# Altium PCB BaseBoard.PcbDoc (part 2 of 2)
Units mm, origin at the board's own origin, x right, y up, seen from the top; angles counter-clockwise.
Board outline 100 x 100 mm, 2 copper layers (Top Layer, Bottom Layer); 106 components, 85 nets, 460 pads, 124 vias.
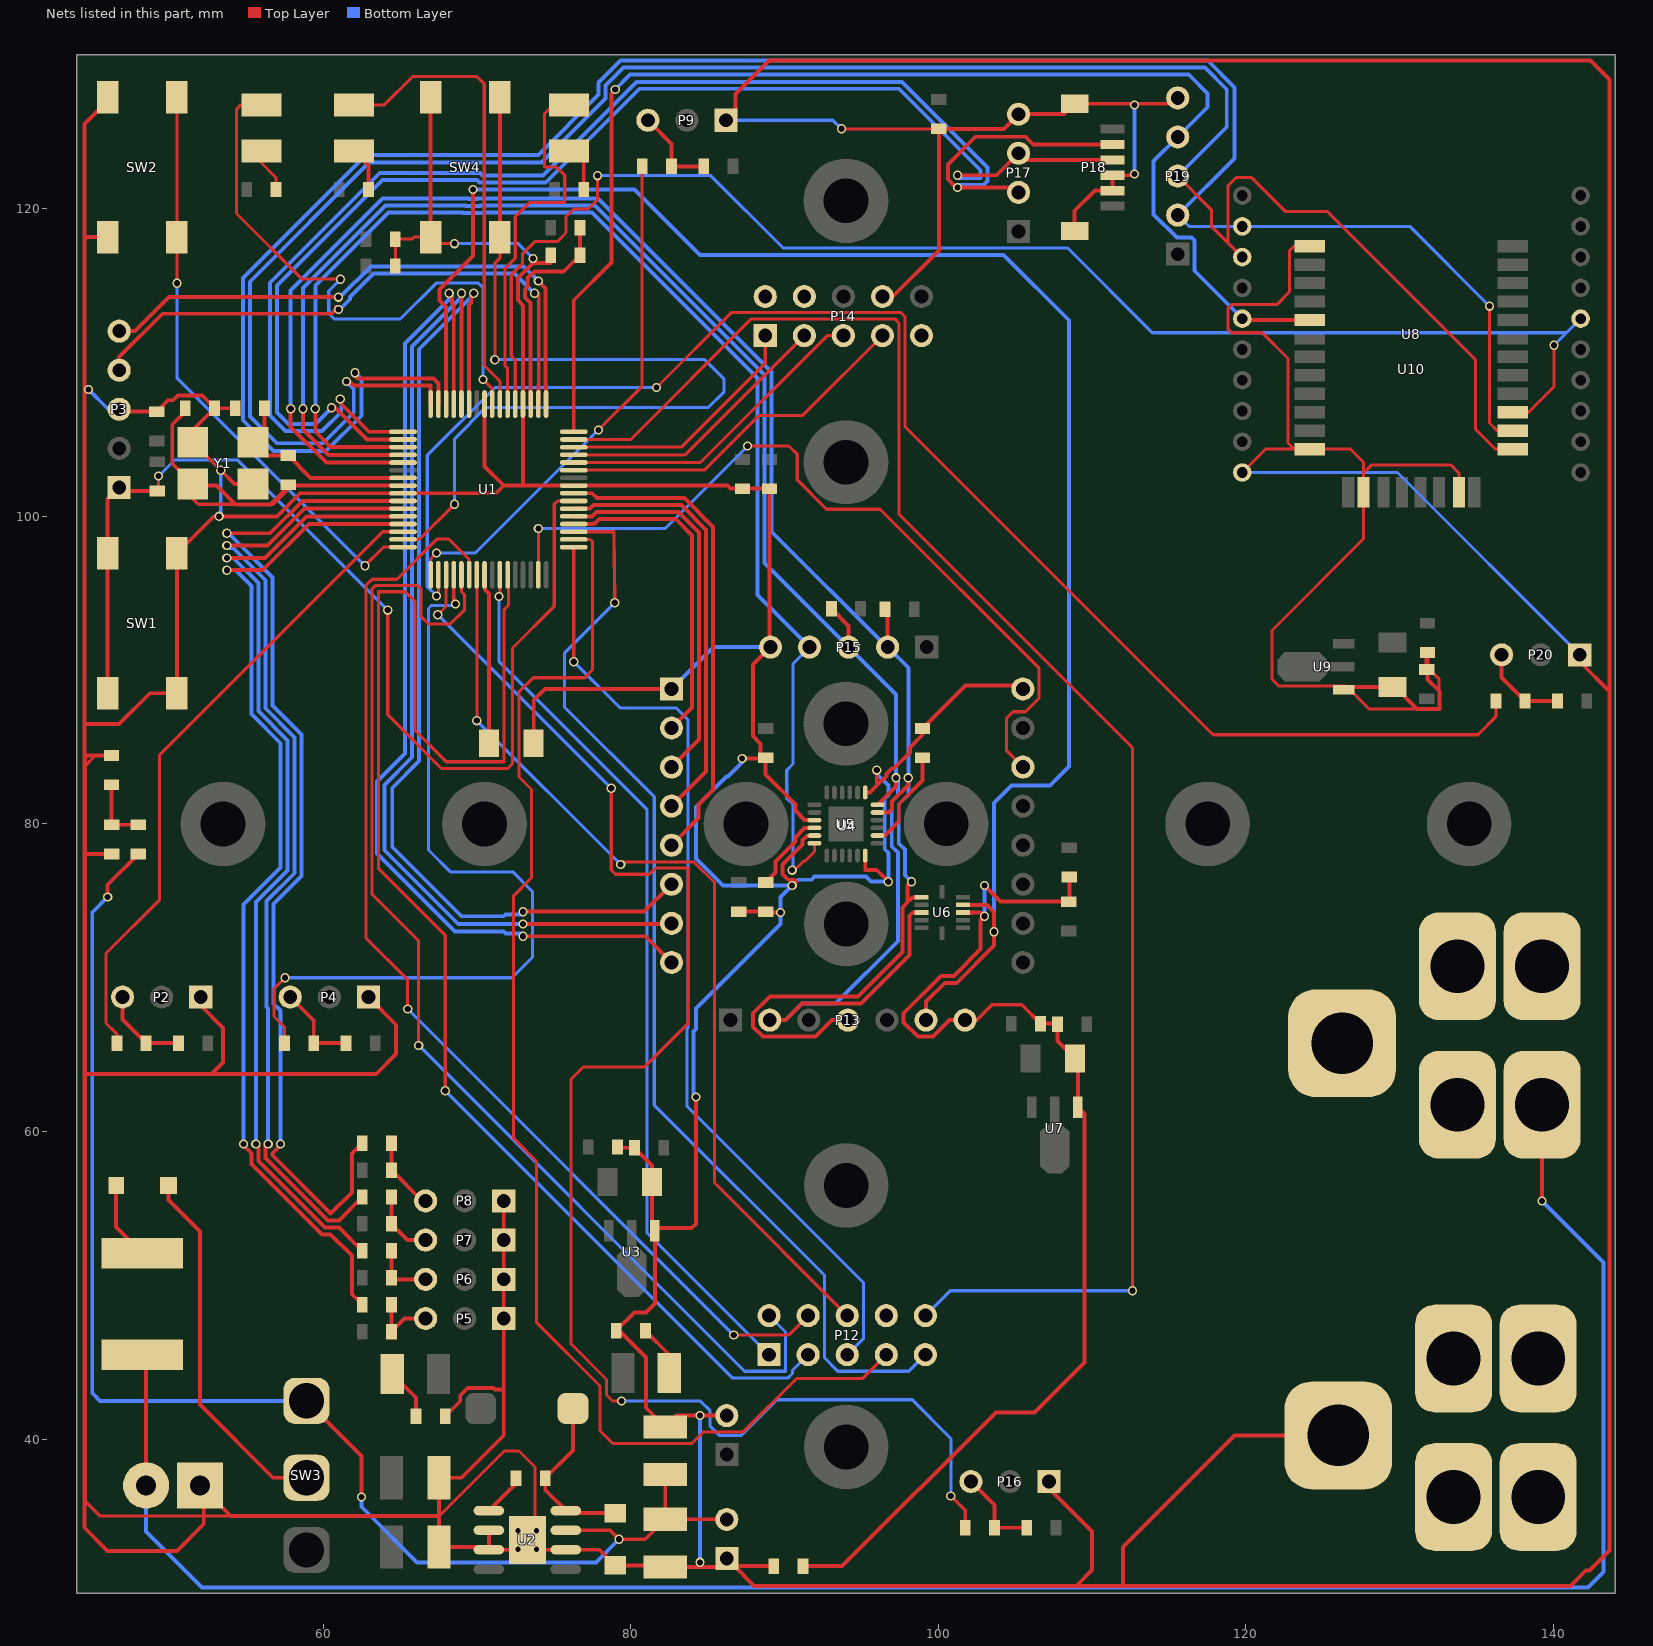
[diagram p2: the nets of this part, all layers, seen from the top]

## Via types
v1: diameter 0.6, hole 0.4, Top Layer to Bottom Layer, 116 vias
v2: diameter 0.7, hole 0.4, Top Layer to Bottom Layer, tented top, 4 vias
v3: diameter 0.66, hole 0.33, Top Layer to Bottom Layer, tented top, 4 vias

## Nets (pads, with @x,y where several pads share a name; then routed paths per layer and width w, separated by ;. In a path a pad name is that pad's centre, name@x,y a point inside that pad or via, vN(x,y) a via of type N, cw(c..) or ccw(c..) an arc to the next point about the centre after c; other vN are vias at no path point) (continued)
11V1-UF: F1.1 P1.2 pad.0@126.25,65.75 pad.1@133.75,61.75 pad.1@139.25,61.75 pad.2@133.75,70.75 pad.2@139.25,70.75 | length 140.3
  Top Layer w0.254: F1.1@48.25,45.5 48.5,45.25 P1.2@48.5,37 ; v1(139.25,55.5) pad.1@139.25,61.75
  Bottom Layer w0.254: P1.2@48.5,37 48.5,34 52.123,30.377 142.25,30.377 143.25,31.377 143.25,51.5 v1(139.25,55.5)
AVDD: C11.2 R20.1 U1.19 | length 14.2
  Top Layer w0.254: U1.19@73.5,107.3 73.5,113.863 73.123,114.24 73.123,114.759 73.307,114.943 73.307,115.493 73.74,115.927 75.652,115.927 C11.2@76.7,116.975 R20.1@76.7,118.75
"BATTERY VOLTAGE": C1.2 R1.1 R3.2 | length 4.3
  Top Layer w0.254: R1.1@46.25,82.55 46.25,79.975 C1.2@46.275,79.95 R3.2@48,79.95
FU1: P12.1 U1.58 | length 58
  Top Layer w0.2: v1(71.45,94.793) 71.5,94.843 U1.58@71.5,96.2
  Bottom Layer w0.2: v1(71.45,94.793) 71.45,90.551 81.051,80.95 81.051,53.449 P12.1@89,45.5
FU2: P12.3 U1.59 | length 96.3
  Top Layer w0.2: v1(67.945,62.662) 67.945,72.771 63.602,77.114 63.602,95.098 63.603,95.099 65.352,95.099 65.98,94.472 65.98,86.09 68.021,84.049 71.755,84.049 71.755,93.905 72.05,94.2 72.05,95.343 72,95.393 U1.59@72,96.2
  Bottom Layer w0.2: v1(67.945,62.662) 86.628,43.979 90.221,43.979 90.521,44.279 90.521,44.481 P12.3@91.54,45.5
FU3: P12.5 U1.1 | length 62.9
  Top Layer w0.2: U1.1@76.3,98 76.302,98 v1(76.302,90.551)
  Bottom Layer w0.2: v1(76.302,90.551) 79.315,87.538 82.972,87.538 83.718,86.792 83.718,66.743 83.65,66.675 83.65,61.663 95.148,50.165 95.148,46.568 P12.5@94.08,45.5
FU4: P12.7 U1.2 | length 87.5
  Top Layer w0.2: U1.2@76.3,98.5 77.368,98.5 77.521,98.348 77.521,90.018 77.013,89.51 73.66,89.51 72.746,88.595 72.746,83.058 73.558,82.245 73.558,76.505 72.39,75.336 72.39,59.563 73.889,58.064 73.889,47.585 78.003,43.47 78.003,40.564 78.842,39.726 83.972,39.726 84.734,40.488 87.325,40.488 90.78,43.942 95.062,43.942 P12.7@96.62,45.5
FU5: P12.9 U1.3 | length 72.1
  Top Layer w0.2: U1.3@76.3,99 78.927,99 v1(78.969,94.386)
  Bottom Layer w0.2: v1(78.969,94.386) 75.692,91.11 75.692,87.605 81.534,81.763 81.534,61.722 92.608,50.648 92.608,45.288 93.472,44.425 98.085,44.425 P12.9@99.16,45.5
FU6: P12.2 U1.53 | length 78.5
  Top Layer w0.2: v1(66.218,65.608) 66.218,72.39 63.195,75.413 63.195,95.296 63.398,95.499 66.146,95.499 66.38,95.266 66.38,93.472 66.853,92.999 68.275,92.999 69.205,93.929 69.205,94.891 69,95.097 U1.53@69,96.2
  Bottom Layer w0.2: v1(66.218,65.608) 87.401,44.425 90.068,44.425 90.068,46.972 P12.2@89,48.04
FU7: P12.4 U1.54 | length 73.5
  Top Layer w0.2: v1(65.507,67.97) 65.507,69.875 62.789,72.593 62.789,95.504 63.195,95.91 64.806,95.91 67.435,98.54 68.161,98.54 69.5,97.2 U1.54@69.5,96.2 ; v1(86.705,46.772) 90.272,46.772 P12.4@91.54,48.04
  Bottom Layer w0.2: v1(65.507,67.97) v1(86.705,46.772)
FU8: P12.6 U1.55 | length 61.2
  Top Layer w0.2: v1(70,86.718) U1.55@70,96.2 ; v1(79.35,77.368) 79.511,77.53 84.11,77.53 85.446,76.194 85.446,56.674 P12.6@94.08,48.04
  Bottom Layer w0.2: v1(70,86.718) v1(79.35,77.368)
FU9: P12.8
FU10: P12.10 U1.15 | length 107.8
  Top Layer w0.2: U1.15@76.3,105 80.006,105 87.846,112.84 97.167,112.84 97.434,112.573 97.434,100.152 112.624,84.963 v1(112.624,49.657)
  Bottom Layer w0.2: P12.10@99.16,48.04 100.777,49.657 v1(112.624,49.657)
FU11: P14.1 U1.14 | length 16.5
  Top Layer w0.2: U1.14@76.3,104.5 83.298,104.5 88.75,109.952 P14.1@88.75,111.75
FU12: P14.3 U1.13 | length 18.2
  Top Layer w0.2: U1.13@76.3,104 83.54,104 P14.3@91.29,111.75
FU13: P14.5 U1.12 | length 20.9
  Top Layer w0.2: U1.12@76.3,103.5 84.526,103.5 92.776,111.75 P14.5@93.83,111.75
FU14: P14.7 U1.11 | length 23.7
  Top Layer w0.2: U1.11@76.3,103 84.788,103 88.352,106.564 91.184,106.564 P14.7@96.37,111.75
FU15: P14.9
FU16: P14.2
FU17: P14.4
GND: C1.1 C2.1 C3.1 C4.1 C5.1 C6.1 C7.1 C8.1 C9.1 C11.1 C12.1 C13.1 C14.1 C15.1 C16.1 C17.1 C18.1 C19.1 C20.1 C21.1 C22.1 C23.1 C29.1 C30.1 C31.1 D6.1 P1.1 P2.1 P3.3 P4.1 P5.1 P6.1 P7.1 P8.1 P9.1 P10.1 P11.2 P14.8 P15.5 P16.1 P17.4 P18.0 P18.A4 P18.A5 P19.5 P20.1 pad.0@126,40.25 pad.1@133.5,36.25 pad.1@139,36.25 pad.2@133.5,45.25 pad.2@139,45.25 R1.2 R19.1 R22.1 R25.2 SW1.1 SW1.4 SW2.1 SW2.4 SW4.1 SW4.4 U1.9 U1.20 U1.25 U1.41 U2.2 U2.3 U2.6 U2.9 U3.1 U4.1 U4.16 U5.1 U5.9 U5.11 U5.18 U8.10 U9.1 U10.1 U10.12 U10.28 U10.29 Y1.2 Y1.4 | length 996.8
  Top Layer w0.2: 44.55,84.45 44.55,83.788 ; R1.2@46.25,84.45 45.212,84.45 44.55,83.788 ; C7.1@64.7,116.275 C8.1@64.7,118.025 65.786,118.025 65.911,118.15 SW4.4@67,118.15 67,117.729 v1(68.555,117.729) ; v3(72.684,34.053) 72.684,33.452 U2.9@73.284,33.453 ; v1(73.66,116.764) 73.949,116.475 74.8,116.475 C11.1@74.8,116.975 ; v3(73.884,34.053) 73.787,34.15 73.787,38.202 72.746,39.243 71.78,39.243 67.539,35.001 45.517,35.001 44.55,35.968 44.55,78.05 44.55,83.788 ; v1(93.703,125.194) C23.1@100.037,125.194 ; U8.10@119.759,102.852 121.273,104.366 123.139,104.366 ; U10.1@124.145,117.566 123.139,117.566 122.834,117.261 122.834,114.605 121.996,113.767 119.075,113.767 118.847,113.538 118.847,112.166 119.075,111.938 121.056,111.938 122.733,110.261 122.733,104.772 123.139,104.366 ; C31.1@131.8,91.144 131.8,90.171 132.563,89.408 132.563,87.478 128.014,87.478 126.517,88.974 122.125,88.974 121.691,89.408 121.691,92.583 127.645,98.537 U10.29@127.645,101.566 127.645,102.819 ; U10.28@133.845,101.566 133.845,102.819 133.337,103.327 128.153,103.327 127.645,102.819 ; 123.139,104.366 U10.12@124.145,104.366 126.797,104.366 127.645,103.518 127.645,102.819
  Top Layer w0.254: 44.55,78.05 C1.1@46.275,78.05 ; 44.55,84.45 R1.2@46.25,84.45 ; v1(44.75,108.25) v1@44.5,108.25 ; SW2.4@46,118.15 44.65,118.15 44.5,118 ; SW2.1@46,127.25 46,127 44.5,125.5 44.5,118 ; P3.3@46.75,106.96 46.904,106.806 C3.1@49.19,106.806 49.93,107.546 50.259,107.546 50.565,107.852 52.148,107.852 52.95,107.05 C2.1@52.95,107.025 ; P1.1@52,37 P1.1@52.25,36.75 ; P2.1@52.05,68.75 52.05,68.2 53.5,66.75 53.5,64.5 52.75,63.75 ; C4.1@54.3,107.035 54.29,107.025 C2.1@52.95,107.025 ; Y1.2@55.45,102.1 54.25,102.1 v1(53.35,103) Y1.4@51.525,104.825 51.525,105.6 C2.1@52.95,107.025 ; P4.1@62.95,68.75 64.75,66.95 64.75,65.037 63.463,63.75 52.75,63.75 ; SW4.4@67,118.15 SW4.1@67,127.25 ; R19.1@67.95,41.5 68.923,42.473 68.923,42.843 69.407,43.327 71.093,43.327 71.17,43.25 71.75,43.25 ; U1.25@70.5,107.3 70.5,103.25 71.75,102 ; U2.2@70.784,34.088 U2.3@70.784,32.818 ; P8.1@71.75,55.5 P7.1@71.75,52.95 P6.1@71.75,50.4 P5.1@71.75,47.85 71.75,43.25 ; C9.1@73.7,85.25 73.7,88.05 74.43,88.78 U4.1@82.66,88.78 ; C11.1@74.8,116.475 73.646,116.475 72.669,115.498 72.669,114.052 73,113.721 U1.20@73,107.3 73,102 ; C13.1@79.15,59 79.2,58.95 C16.1@80.25,58.95 81.4,57.8 C12.1@81.4,56.725 81.4,53.724 U3.1@81.57,53.554 ; v1(84.25,62.25) 84.25,54 83.974,53.724 81.74,53.724 U3.1@81.57,53.554 ; v1(84.5,32) v1@84.5,31.7 ; P9.1@86.2,125.75 86.627,125.75 86.823,125.946 86.823,127.465 88.981,129.623 142.392,129.623 143.623,128.392 143.623,88.627 ; P11.2@86.25,41.54 v1(84.5,41.54) 82.99,41.54 C15.1@82.25,40.8 81,42.05 81,45.319 79.272,47.047 R22.1@79.06,47.047 79.06,47.06 80.25,48.25 81,48.25 81.57,48.82 U3.1@81.57,53.554 ; C18.1@87.025,74.3 C17.1@88.775,74.3 88.825,74.25 v1(89.75,74.25) ; v1(87.25,84.25) 88.725,84.25 C19.1@88.775,84.3 ; R25.2@89.3,31.75 P10.1@86.75,31.75 ; v1(90.5,76) 90.75,76.25 90.627,76.373 90.24,76.373 89.873,76.74 89.873,77.373 91.173,78.673 91.173,78.948 91.452,79.227 91.927,79.227 U5.11@91.95,79.25 ; U5.9@91.95,80.25 91.927,80.273 91.31,80.273 90.719,80.864 90.719,81.281 88.775,83.225 C19.1@88.775,84.3 ; U5.18@95.25,77.95 95.25,77 96,77 v1(96.75,76.25) ; U5.1@95.25,82.05 95.55,82.05 96,82.5 ; v1(96,83.5) 96,82.5 ; P14.8@96.37,114.29 97.04,114.29 100.037,117.287 C23.1@100.037,125.194 104.269,125.194 P17.4@105.219,126.144 108.184,126.144 P18.0@108.865,126.825 v1@112.75,126.825 ; U4.16@105.5,88.78 105.28,89 101.775,89 C22.1@98.975,86.2 98.975,85.804 98.148,84.977 98.148,84.648 97.127,83.627 96.99,83.627 96.623,83.26 96.623,83.123 96,82.5 ; P16.1@107.2,37.25 107.2,36.8 110,34 110,31.5 108.969,30.469 ; P18.0@108.865,118.55 108.865,119.865 110.175,121.175 P18.A5@111.315,121.175 P18.A4@111.315,122.175 112.675,122.175 v1(112.75,122.25) ; v1(112.75,126.75) v1@112.75,126.825 ; P19.5@115.568,127.202 115.191,126.825 v1@112.75,126.825 ; pad.0@126,40.25 119.25,40.25 112,33 112,30.469 ; U9.1@126.354,88.724 126.524,88.894 C29.1@129.525,88.894 129.688,88.894 131.115,87.467 132.567,87.467 132.577,87.477 132.577,88.63 131.8,89.407 C31.1@131.8,91.144 131.75,91.094 C30.1@131.75,90.044 ; P20.1@141.7,91 141.7,90.55 143.623,88.627 ; 44.5,63.75 52.75,63.75 ; 44.5,63.75 44.5,86.5 ; 44.5,63.75 44.5,34.25 46,32.75 50.5,32.75 52.25,34.5 P1.1@52.25,36.75 ; 44.5,86.5 v1@44.5,108.25 ; 44.5,86.5 46.75,86.5 48.75,88.5 SW1.1@50.5,88.5 SW1.4@50.5,97.6 52.9,100 v1(53.25,100) 57.012,100 58.512,101.5 U1.41@65.2,101.5 71.25,101.5 71.75,102 ; v1@44.5,108.25 44.5,118 ; P1.1@52.25,36.75 54,35 67.5,35 67.55,35.05 ; 67.55,35.05 C5.1@67.55,33 70.602,33 U2.3@70.784,32.818 ; 67.55,35.05 C6.1@67.55,37.5 69,37.5 71.75,40.25 71.75,43.25 ; U2.3@70.784,32.818 72.649,32.818 v3(72.684,32.853) U2.9@73.284,33.453 v3(73.884,32.853) 73.919,32.818 U2.6@75.784,32.818 77.982,32.818 D6.1@79,31.8 82.15,31.8 C14.1@82.25,31.7 v1@84.5,31.7 ; 71.75,102 73,102 ; 73,102 U1.9@76.3,102 86.3,102 86.5,101.8 C21.1@87.275,101.8 C20.1@89.025,101.8 89.025,91.565 P15.5@89.09,91.5 87.948,90.358 87.948,85.715 88.45,85.213 88.45,84.3 C19.1@88.775,84.3 ; v1@84.5,31.7 85.7,31.7 P10.1@86.25,32.25 P10.1@86.75,31.75 ; P10.1@86.75,31.75 88.031,30.469 108.969,30.469 ; 108.969,30.469 112,30.469 ; 112,30.469 141.092,30.469 142.092,31.469 142.324,31.469 143.623,32.768 143.623,88.627
  Bottom Layer w0.2: v1(68.555,117.729) 72.695,117.729 v1(73.66,116.764) ; v3(72.684,34.053) v3(73.884,34.053) ; P9.1@86.2,125.75 93.147,125.75 v1(93.703,125.194) ; U8.10@119.759,102.852 129.848,102.852 P20.1@141.7,91
  Bottom Layer w0.254: v1(44.75,108.25) 46.04,106.96 P3.3@46.75,106.96 ; v1(53.25,100) 53.35,100.1 v1(53.35,103) ; U4.1@82.66,88.78 85.38,91.5 P15.5@89.09,91.5 ; v1(84.25,62.25) 84.168,62.168 84.082,62.168 84.082,66.503 84.25,66.671 84.25,68 89.75,73.5 v1(89.75,74.25) 89.75,75.25 v1(90.5,76) ; v1(84.5,32) v1(84.5,41.54) ; v1(87.25,84.25) 87.25,84 86.327,83.077 86.225,83.077 84.25,81.102 84.25,77.75 86,76 v1(90.5,76) ; v1(96,83.5) 96,83.25 96.75,82.5 96.75,81.886 96.522,81.657 96.522,78.356 96.75,78.128 v1(96.75,76.25) 95.615,76.25 95.288,76.577 91.964,76.577 91.76,76.373 90.873,76.373 v1(90.5,76) ; v1(112.75,122.25) v1(112.75,126.75)
GNDA: C24.1 C25.1 C26.1 C27.1 C28.1 P13.7 R25.1 U6.3 U7.1 | length 79.5
  Top Layer w0.254: R25.1@91.2,31.75 93.75,31.75 103.75,41.75 106.25,41.75 109.5,45 109.5,61.149 U7.1@109.07,61.579 109.07,64.58 C24.1@108.9,64.75 107.75,65.9 C26.1@107.75,66.975 107.7,67.025 C25.1@106.65,67.025 105.425,68.25 103.5,68.25 102.5,67.25 P13.7@101.74,67.25 100.723,67.25 99.646,66.173 98.673,66.173 97.75,67.096 97.75,67.698 100.175,70.123 101.01,70.123 102.75,71.863 102.75,73.75 v1(103,74) 102.75,74.25 U6.3@101.6,74.25 101.623,74.227 102.185,74.227 ; v1(103,76) 104.05,74.95 C27.1@108.475,74.95 108.525,75 C28.1@108.525,76.55
  Bottom Layer w0.254: v1(103,74) v1(103,76)
"GPS - MISO": P17.3 P18.A3 U1.34 | length 84.3
  Top Layer w0.254: v1(60.557,107.057) 60.801,107.057 62.858,105 U1.34@65.2,105 ; v1(101.25,122.173) 103.788,122.173 P17.3@105.219,123.604 105.648,123.175 P18.A3@111.315,123.175
  Bottom Layer w0.254: v1(60.557,107.057) 59.5,106 57.75,106 57,106.75 57,115 63.877,121.877 70.01,121.877 70.183,121.704 74.483,121.704 80.575,127.796 97.454,127.796 102.75,122.5 102.75,122 101.423,122 v1(101.25,122.173)
"GPS - MOSI": P17.2 P18.A2 U1.33 | length 95.2
  Top Layer w0.254: v1(61.122,107.622) 61.122,107.378 63,105.5 U1.33@65.2,105.5 ; v1@101.163,121.373 100.623,121.913 100.623,122.873 102.431,124.681 105.665,124.681 106.171,124.175 P18.A2@111.315,124.175 ; v1(101.25,121.373) 104.91,121.373 P17.2@105.219,121.064
  Bottom Layer w0.254: v1(61.122,107.622) 61.184,107.561 61.184,106.797 59.933,105.546 57.562,105.546 56.546,106.562 56.546,115.188 63.689,122.331 70.198,122.331 70.371,122.158 74.295,122.158 80.387,128.25 97.642,128.25 103.204,122.688 103.204,121.812 102.938,121.546 101.423,121.546 v1(101.25,121.373)
"IMU ANALOG CONFIGMODE": U1.63 U4.14 | length 53
  Top Layer w0.2: U1.63@74,96.2 v1(74,99.212) ; v1(87.605,104.572) 90.297,104.572 90.83,104.038 90.83,102.37 92.737,100.464 96.209,100.464 106.553,90.119 106.553,88.189 105.664,87.3 104.851,87.3 104.445,86.893 104.445,84.755 U4.14@105.5,83.7
  Bottom Layer w0.2: v1(74,99.212) 82.245,99.212 v1(87.605,104.572)
"IMU ANALOG X": U1.27 U4.6 | length 66.4
  Top Layer w0.254: U1.27@69.5,107.3 69.5,113.75 69.627,113.877 69.627,114.327 v1(69.8,114.5) ; v1(73,74.3) 80.88,74.3 U4.6@82.66,76.08
  Bottom Layer w0.254: v1(69.8,114.5) 69.8,114.413 66.25,110.863 66.25,84.086 64.5,82.336 64.5,78.5 69,74 71.75,74 71.877,74.127 72.827,74.127 v1(73,74.3)
"IMU ANALOG Y": U1.28 U4.7 | length 66.1
  Top Layer w0.254: U1.28@69,107.3 v1(69,114.5) ; v1(73,73.5) 82.62,73.5 U4.7@82.66,73.54
  Bottom Layer w0.254: v1(69,114.5) 69,114.255 65.796,111.051 65.796,84.339 64,82.543 64,78.293 68.793,73.5 v1(73,73.5)
"IMU ANALOG Z": U1.29 U4.8 | length 67.8
  Top Layer w0.254: v1(68.2,114.5) 68.373,114.327 68.373,113.877 68.5,113.75 U1.29@68.5,107.3 ; v1(73,72.7) 80.96,72.7 U4.8@82.66,71
  Bottom Layer w0.254: v1(68.2,114.5) 68.2,114.097 65.342,111.239 65.342,84.592 63.5,82.75 63.5,78.086 68.586,73 71.75,73 71.877,72.873 72.827,72.873 v1(73,72.7)
"IMU INTERRUPT": U1.8 U4.5 | length 31.8
  Top Layer w0.254: U1.8@76.3,101.5 77.5,101.5 77.819,101.181 83.495,101.181 85.362,99.314 85.362,82.214 84.423,81.275 84.423,80.383 U4.5@82.66,78.62
"IMU PWM X": U1.4 U4.2 | length 21.3
  Top Layer w0.254: U1.4@76.3,99.5 77.5,99.5 77.546,99.546 77.688,99.546 77.961,99.819 82.931,99.819 84,98.75 84,87.58 U4.2@82.66,86.24
"IMU PWM Y": U1.5 U4.3 | length 24.8
  Top Layer w0.254: U1.5@76.3,100 77.5,100 77.773,100.273 83.119,100.273 84.454,98.938 84.454,85.494 U4.3@82.66,83.7
"IMU PWM Z": U1.6 U4.4 | length 28.3
  Top Layer w0.254: U1.6@76.3,100.5 77.358,100.5 77.585,100.727 83.307,100.727 84.908,99.126 84.908,83.408 U4.4@82.66,81.16
"INPUT 11.1V": D1.2 SW3.1 | length 24
  Top Layer w0.254: D1.2@49.95,56.5 49.95,55.55 52,53.5 52,42.25 56.75,37.5 SW3.1@58.925,37.5
"INPUT 11.1V-AFTERSW": C14.2 C15.2 P10.2 R3.1 SW3.2 U2.7 | length 91.8
  Top Layer w0.254: v1(46,75.25) 46,76.05 R3.1@48,78.05 ; SW3.2@58.925,42.5 62.5,38.925 v1(62.5,36.25) ; U2.7@75.784,34.088 78.662,34.088 v1(79.25,33.5) 80.95,33.5 C14.2@82.25,34.8 ; C15.2@82.25,37.7 C14.2@82.25,34.8 ; P10.2@86.25,34.79 86.24,34.8 C14.2@82.25,34.8
  Bottom Layer w0.254: v1(46,75.25) 45,74.25 45,43 45.5,42.5 SW3.2@58.925,42.5 ; v1(62.5,36.25) 62.5,35.613 66.113,32 77.75,32 v1(79.25,33.5)
"INT0 ACCELEROMETER": P13.6 U1.30 U6.4 | length 112.1
  Top Layer w0.254: U1.30@68,107.3 68,113.608 67.573,114.035 67.573,114.76 69.75,116.937 v1(69.75,121.25) ; P13.6@99.2,67.25 99.2,68.45 100.419,69.669 101.198,69.669 103.627,72.098 v1(103.627,73) 103.627,74.265 103.165,74.727 101.623,74.727 U6.4@101.6,74.75
  Bottom Layer w0.254: v1(69.75,121.25) 80.25,121.25 84.5,117 104.25,117 108.5,112.75 108.5,83.75 107.25,82.5 104.75,82.5 103.627,81.377 v1(103.627,73)
"INT1 GYRO": P15.4 U1.35 U5.12 | length 87.5
  Top Layer w0.2: v1(90.5,77) 90.651,77 91.251,77.6 91.35,77.6 91.95,78.2 U5.12@91.95,78.75
  Top Layer w0.254: v1(59.5,107) 59.5,105.5 60.5,104.5 U1.35@65.2,104.5
  Bottom Layer w0.2: v1(90.5,77) 90.55,77.05 90.55,81.263 90.15,81.663 90.15,83.499 90.55,83.899 90.55,90.42 P15.4@91.63,91.5
  Bottom Layer w0.254: v1(59.5,107) 59.5,115 64.25,119.75 69.079,119.75 69.114,119.715 70.386,119.715 70.421,119.75 77.5,119.75 88.25,109 88.25,94.88 P15.4@91.63,91.5
LED1: D3.2 U1.23 | length 30.7
  Top Layer w0.2: D3.2@62,126.75 63.987,126.75 65.837,128.6 70.002,128.6 70.485,128.118 70.485,109.809 71.5,108.794 U1.23@71.5,107.3
LED2: D2.2 U1.24 | length 38.7
  Top Layer w0.2: D2.2@56,126.75 54.661,126.75 54.381,126.471 54.381,119.685 58.649,115.418 v1(61.138,115.418) ; v1(70.409,108.897) 71,108.306 U1.24@71,107.3
  Bottom Layer w0.2: v1(61.138,115.418) 60.376,114.656 60.376,113.182 60.731,112.827 65.024,112.827 67.361,115.164 70.104,115.164 70.409,114.859 v1(70.409,108.897)
LED3: D5.2 U1.22 | length 24.7
  Top Layer w0.2: U1.22@72,107.3 72,109.616 71.838,109.779 71.838,116.127 72.5,116.789 72.5,119.482 73.414,120.396 75.692,120.396 75.692,120.65 75.717,120.675 75.717,122.167 75.184,122.7 74.4,122.7 74.4,126.169 74.981,126.75 D5.2@76,126.75
M\C\L\R\: P3.1 R5.1 SW1.2 SW1.3 U1.7 | length 72.9
  Top Layer w0.2: P3.1@46.75,101.88 46.75,101.524 46.974,101.524 P3.1@46.974,101.656 ; R5.1@49.215,101.656 49.301,101.656 v1(49.301,102.616) ; v1(64.211,93.902) 64.211,87.097 67.695,83.613 72.005,83.613 72.314,83.922 72.314,91.44 75.032,94.158 75.032,100.787 75.244,101 U1.7@76.3,101
  Top Layer w0.254: SW1.2@46,88.5 SW1.3@46,97.6 46,101.13 P3.1@46.75,101.88 ; P3.1@46.974,101.656 R5.1@49.215,101.656
  Bottom Layer w0.2: v1(49.301,102.616) 50.343,103.657 54.456,103.657 v1(64.211,93.902)
NetC1.1_2: C9.2 U1.56 | length 11.1
  Top Layer w0.254: U1.56@70.5,96.2 70.523,96.177 70.523,95.252 70.8,94.975 C9.2@70.8,85.25
NetC11.22_2: C17.2 U5.10 | length 5.2
  Top Layer w0.254: C17.2@88.775,76.2 89.419,76.844 89.419,77.561 90.719,78.861 90.719,79.136 91.31,79.727 91.927,79.727 U5.10@91.95,79.75
NetC12.22_2: C22.2 U5.20 | length 6.5
  Top Layer w0.254: U5.20@96.05,79.25 96.525,79.25 97.43,80.155 97.43,81.281 98.975,82.827 C22.2@98.975,84.3
NetC14.7_1: C10.1 U2.1 | length 2.8
  Top Layer w0.254: U2.1@70.784,35.358 72.55,37.124 C10.1@72.55,37.475
NetC14.7_2: C10.2 D6.2 L1.1 U2.8 | length 11.2
  Top Layer w0.254: L1.1@76.25,42 76.25,39.275 C10.2@74.45,37.475 74.45,36.692 U2.8@75.784,35.358 75.942,35.2 D6.2@79,35.2
NetD1.8_1: D1.1 F1.2 | length 5.1
  Top Layer w0.254: D1.1@46.55,56.5 46.55,53.8 F1.2@48.25,52.1
NetD3.4_2: D4.2 R19.2 | length 3.4
  Top Layer w0.254: D4.2@64.5,44.25 66.05,42.7 R19.2@66.05,41.5
NetD4.4_2: D7.2 R22.2 | length 3.4
  Top Layer w0.254: R22.2@80.96,47.047 82.51,45.497 D7.2@82.51,44.297
NetD5.4_1: D3.1 R17.1 | length 2.9
  Top Layer w0.254: D3.1@62,123.75 62.95,122.8 R17.1@62.95,121.25
NetD6.4_1: D2.1 R6.1 | length 2.9
  Top Layer w0.2: D2.1@56,123.75 56,122.972 56.95,122.022 R6.1@56.95,121.25
NetD7.4_1: D5.1 R21.1 | length 3.5
  Top Layer w0.2: D5.1@76,123.75 76.95,123.75 76.95,122.8
  Top Layer w0.254: R21.1@76.95,121.25 76.95,122.8
NetP4.9_3: P2.3 R2.1 R4.1 | length 5.7
  Top Layer w0.254: P2.3@46.97,68.75 46.97,67.28 R2.1@48.5,65.75 R4.1@50.6,65.75
NetP4.10_3: P9.3 R23.1 R24.1 | length 5.7
  Top Layer w0.254: P9.3@81.12,125.75 82.65,124.22 R23.1@82.65,122.75 R24.1@84.75,122.75
NetP4.11_3: P20.3 R30.1 R31.1 | length 5.7
  Top Layer w0.254: P20.3@136.62,91 136.62,89.53 R30.1@138.15,88 R31.1@140.25,88
NetP4.12_3: P16.3 R28.1 R29.1 | length 5.7
  Top Layer w0.254: P16.3@102.12,37.25 103.65,35.72 R28.1@103.65,34.25 R29.1@105.75,34.25
NetP4.13_3: P8.3 R15.1 R16.1 | length 4.8
  Top Layer w0.254: R16.1@64.45,59.25 R15.1@64.45,57.5 66.45,55.5 P8.3@66.67,55.5
NetP4.14_3: P7.3 R13.1 R14.1 | length 4.4
  Top Layer w0.254: R13.1@64.45,55.75 R14.1@64.45,54 65.5,52.95 P7.3@66.67,52.95
NetP4.15_3: P6.3 R11.1 R12.1 | length 4
  Top Layer w0.254: R12.1@64.45,52.25 R11.1@64.45,50.5 64.55,50.4 P6.3@66.67,50.4
NetP4.16_3: P5.3 R9.1 R10.1 | length 4.3
  Top Layer w0.254: R9.1@64.45,48.75 R10.1@64.45,47 65.3,47.85 P5.3@66.67,47.85
NetP4.17_3: P4.3 R7.1 R18.1 | length 5.7
  Top Layer w0.254: P4.3@57.87,68.75 59.4,67.22 R7.1@59.4,65.75 R18.1@61.5,65.75
OSC1: C4.2 R8.2 U1.39 Y1.3 | length 13.2
  Top Layer w0.254: C4.2@56.2,107.035 56.2,105.575 Y1.3@55.45,104.825 56.325,103.95 R8.2@57.75,103.95 59.2,102.5 U1.39@65.2,102.5
OSC2: C2.2 R8.1 U1.40 Y1.1 | length 29.1
  Top Layer w0.2: Y1.1@51.05,101.625 51.888,100.787 56.769,100.787 57.861,101.879 57.861,102.05 R8.1@57.75,102.05
  Top Layer w0.254: Y1.1@51.05,101.625 Y1.1@51.525,102.1 ; C2.2@51.05,107.025 51.05,106.812 50.198,105.96 50.198,103.427 Y1.1@51.525,102.1 ; U1.40@65.2,102 57.812,102 57.806,101.994 56.585,100.773 54.315,100.773 53.088,102 51.625,102 Y1.1@51.525,102.1
PGC: P3.5 U1.17 | length 37.6
  Top Layer w0.254: P3.5@46.75,112.04 47.79,112.04 50,114.25 v1(61,114.25) ; v1(74,115.3) 74.477,114.823 74.477,108.523 74.5,108.5 U1.17@74.5,107.3
  Bottom Layer w0.254: v1(61,114.25) 61.108,114.25 63.108,116.25 73.05,116.25 v1(74,115.3)
PGD: P3.4 U1.18 | length 38.6
  Top Layer w0.254: P3.4@46.75,109.5 46.75,110.358 49.561,113.169 60.561,113.169 60.827,113.435 60.827,113.623 61,113.623 v1(61,113.45) ; v1(73.75,114.5) 74.023,114.5 74.023,108.523 74,108.5 U1.18@74,107.3
  Bottom Layer w0.254: v1(61,113.45) 61.087,113.45 61.75,114.113 61.75,114.25 63.296,115.796 72.454,115.796 v1(73.75,114.5)
R\E\S\E\T\: P19.4 U1.16 U8.5 U10.5 | length 86.3
  Top Layer w0.2: U8.5@119.759,112.852 120.016,112.852 U8.5@120.016,112.766
  Top Layer w0.254: U1.16@76.3,105.5 76.3,114.05 78.75,116.5 78.75,127.5 v1(79,127.75) ; U8.5@120.016,112.766 U10.5@124.145,112.766
  Bottom Layer w0.254: v1(79,127.75) 79.965,128.715 116.285,128.715 117.5,127.5 117.5,126.594 P19.4@115.568,124.662 114,123.094 114,119.627 115.508,118.119 116.453,118.119 116.645,117.927 116.645,115.966 U8.5@119.759,112.852
SCL: P13.4 P15.2 R27.2 U1.37 U5.23 U6.7 | length 124
  Top Layer w0.254: v1(57.9,107) 57.9,105.816 60.216,103.5 U1.37@65.2,103.5 ; P13.4@94.12,67.25 93.103,67.25 92.026,66.173 88.594,66.173 87.963,66.804 87.963,67.696 89.048,68.781 94.781,68.781 97.669,71.669 97.669,74.581 98,74.912 ; U5.23@96.05,80.75 96.75,80.75 96.976,80.976 96.976,81.469 98.05,82.544 v1(98.05,83) ; R27.2@96.54,93.962 96.71,93.792 P15.2@96.71,91.5 ; v1(98.25,76.25) 98,76 98,74.912 ; U6.7@98.9,75.25 98.877,75.227 98.315,75.227 98,74.912
  Bottom Layer w0.254: v1(57.9,107) 57.9,114.684 63.874,120.658 69.455,120.658 69.49,120.623 70.01,120.623 70.045,120.658 77.876,120.658 89.158,109.376 89.158,99 96.658,91.5 P15.2@96.71,91.5 98.05,90.16 v1(98.05,83) 98.05,81.902 97.43,81.281 97.43,78.732 97.831,78.331 97.831,76.669 v1(98.25,76.25)
SDA: P13.2 P15.3 R26.2 U1.36 U5.24 U6.9 | length 123.9
  Top Layer w0.254: v1(58.7,107) 58.7,105.658 60.358,104 U1.36@65.2,104 ; P13.2@89.04,67.25 90.057,67.25 91.134,68.327 94.969,68.327 98.123,71.481 98.123,74.035 98.338,74.25 U6.9@98.9,74.25 ; R26.2@93.05,94 94.17,92.88 P15.3@94.17,91.5 ; U5.24@96.05,81.25 97.25,82.45 v1(97.25,83)
  Bottom Layer w0.254: v1(58.7,107) 58.7,114.842 64.062,120.204 69.267,120.204 69.302,120.169 70.198,120.169 70.233,120.204 77.688,120.204 88.704,109.188 88.704,96.966 P15.3@94.17,91.5 97.25,88.42 v1(97.25,83) 97.377,82.873 97.377,81.871 96.976,81.469 96.976,78.544 97.377,78.143 97.377,72.377 93.327,68.327 91.134,68.327 90.057,67.25 P13.2@89.04,67.25
SERVOSIG1: R2.2 U1.46 | length 42.3
  Top Layer w0.2: R2.2@46.6,65.75 46.6,66.354 45.898,67.056 45.898,71.603 49.378,75.082 49.378,84.497 63.881,99 U1.46@65.2,99
SERVOSIG2: R23.2 U1.49 | length 33.7
  Top Layer w0.2: U1.49@67,96.2 67,97.226 v1(67.386,97.612) ; v1(77.902,105.613) 80.75,108.461 R23.2@80.75,122.75
  Bottom Layer w0.2: v1(67.386,97.612) 69.901,97.612 v1(77.902,105.613)
SERVOSIG3: R30.2 U1.50 | length 101.2
  Top Layer w0.2: v1(67.386,94.818) 67.5,94.932 U1.50@67.5,96.2 ; v1(81.686,108.382) 86.545,113.24 97.58,113.24 97.841,112.979 97.841,105.816 117.856,85.801 135.082,85.801 136.25,86.97 R30.2@136.25,88
  Bottom Layer w0.2: v1(67.386,94.818) 66.777,95.428 66.777,103.962 71.196,108.382 v1(81.686,108.382)
SERVOSIG4: R28.2 U1.51 | length 102.3
  Top Layer w0.2: v1(67.462,93.599) 68,94.137 U1.51@68,96.2 ; v1(78.74,82.321) 78.74,77.013 79.019,76.733 81.214,76.733 81.61,77.13 83.71,77.13 83.718,77.122 83.718,67.005 80.924,64.211 76.937,64.211 76.124,63.398 76.124,46.203 78.435,43.891 78.435,42.875 78.816,42.494 v1(79.4,42.494) ; v1(100.813,36.322) 101.75,35.385 R28.2@101.75,34.25
  Bottom Layer w0.2: v1(67.462,93.599) v1(78.74,82.321) ; v1(79.4,42.494) 84.531,42.494 85.166,41.859 85.166,40.843 85.75,40.259 87.198,40.259 89.51,42.57 98.298,42.57 100.813,40.056 v1(100.813,36.322)
SERVOSIG5: R16.2 U1.42 | length 66.7
  Top Layer w0.254: v1(53.75,98.9) 56.554,98.9 58.654,101 U1.42@65.2,101 ; v1(57.234,59.202) 57.234,59.115 56.716,58.596 56.716,58.466 60.5,54.681 61.873,56.054 61.873,58.573 R16.2@62.55,59.25
  Bottom Layer w0.254: v1(53.75,98.9) 53.85,98.9 56.713,96.037 56.713,87.713 58.612,85.814 58.612,76.612 56.793,74.793 56.793,68.304 57.234,67.862 v1(57.234,59.202)
SERVOSIG6: R13.2 U1.43 | length 63.7
  Top Layer w0.254: v1(53.75,98.1) 56.397,98.1 58.797,100.5 U1.43@65.2,100.5 ; v1(56.434,59.202) 56.262,59.029 56.262,58.277 60.312,54.227 61.027,54.227 R13.2@62.55,55.75
  Bottom Layer w0.254: v1(53.75,98.1) 53.923,97.927 54.181,97.927 56.259,95.849 56.259,87.525 58.158,85.626 58.158,76.8 56.339,74.981 56.339,68.116 56.434,68.02 v1(56.434,59.202)
SERVOSIG7: R12.2 U1.44 | length 63.8
  Top Layer w0.254: v1(53.75,97.3) 56.239,97.3 58.939,100 U1.44@65.2,100 ; v1(55.634,59.202) 55.808,59.029 55.808,58.089 60.124,53.773 61.027,53.773 R12.2@62.55,52.25
  Bottom Layer w0.254: v1(53.75,97.3) 54.166,97.3 55.805,95.661 55.805,87.337 57.704,85.438 57.704,76.988 55.634,74.919 v1(55.634,59.202)
SERVOSIG8: R9.2 U1.45 | length 66.8
  Top Layer w0.254: v1(53.75,96.5) 56.081,96.5 59.081,99.5 U1.45@65.2,99.5 ; v1(54.834,59.202) 54.834,59.115 55.354,58.596 55.354,57.901 59.936,53.319 60.5,53.319 61.873,51.946 61.873,49.427 R9.2@62.55,48.75
  Bottom Layer w0.254: v1(53.75,96.5) 54.324,96.5 55.351,95.473 55.351,87.149 57.25,85.25 57.25,77.176 54.834,74.761 v1(54.834,59.202)
SERVOSIG9: R7.2 U1.52 | length 53.1
  Top Layer w0.2: R7.2@57.5,65.75 57.5,66.802 56.82,67.482 56.82,69.291 v1(57.531,70.002) ; U1.52@68.5,96.2 68.5,94.416 v1(68.605,94.31)
  Bottom Layer w0.2: v1(57.531,70.002) 72.288,70.002 73.609,71.323 73.609,75.616 72.339,76.886 68.275,76.886 66.853,78.308 66.853,94.015 67.056,94.218 68.513,94.218 v1(68.605,94.31)
SW1: SW4.2 SW4.3 U1.47 | length 60.8
  Top Layer w0.2: U1.47@65.2,98.5 66.267,98.5 v1(68.555,100.787) ; v1(71.171,110.185) 71.171,116.459 71.5,116.788 SW4.3@71.5,118.15
  Top Layer w0.254: SW4.3@71.5,118.15 SW4.2@71.5,127.25
  Bottom Layer w0.2: v1(68.555,100.787) 68.555,105.054 70.587,107.086 85.065,107.086 86.081,108.102 86.081,108.915 84.811,110.185 v1(71.171,110.185)
SW2: SW2.2 SW2.3 U1.48 | length 38.5
  Top Layer w0.2: v1(50.5,115.159) SW2.3@50.5,118.15 SW2.2@50.5,127.25 ; v1(62.722,96.79) 63.932,98 U1.48@65.2,98
  Bottom Layer w0.2: v1(50.5,115.159) 50.5,109.012 v1(62.722,96.79)
"UART MISO": P19.2 U1.31 U8.2 U10.14 | length 142.2
  Top Layer w0.2: v1(135.839,113.665) 135.839,106.07 136.344,105.566 U10.14@137.345,105.566
  Top Layer w0.254: v1(62.085,109.335) 62.085,109.123 62.253,108.954 67.188,108.954 67.5,108.642 U1.31@67.5,107.3
  Bottom Layer w0.2: P19.2@115.568,119.582 116.298,118.852 U8.2@119.759,118.852 130.652,118.852 v1(135.839,113.665)
  Bottom Layer w0.254: v1(62.085,109.335) 62.5,108.919 62.5,106.543 60.207,104.25 56.793,104.25 54.796,106.247 54.796,115.503 62.793,123.5 74,123.5 77.919,127.419 77.919,128.198 79.344,129.623 117.519,129.623 119.25,127.892 119.25,123.264 P19.2@115.568,119.582
"UART MOSI": P19.3 U1.32 U8.3 U10.13 | length 142.8
  Top Layer w0.2: P19.3@115.568,122.122 117.754,119.936 117.754,118.857 118.847,117.764 ; U8.3@119.759,116.852 118.847,117.764 ; U10.13@137.345,104.366 136.225,104.366 134.927,105.664 134.927,110.183 125.298,119.812 122.58,119.812 120.371,122.022 119.355,122.022 118.847,121.514 118.847,117.764
  Top Layer w0.254: v1(61.519,108.769) 61.731,108.769 62,108.5 67,108.5 U1.32@67,107.3
  Bottom Layer w0.254: v1(61.519,108.769) 62,108.288 62,106.75 60,104.75 57,104.75 55.25,106.5 55.25,115.25 63,123 74.207,123 78.373,127.166 78.373,128.01 79.532,129.169 117.331,129.169 118.75,127.75 118.75,125.304 P19.3@115.568,122.122
"UART RTS": U1.21 U8.16 U10.15 | length 94.4
  Top Layer w0.2: U1.21@72.5,107.3 72.5,110.17 72.238,110.433 72.238,115.697 72.957,116.417 72.957,117.043 73.77,117.856 75.235,117.856 75.798,118.419 75.798,119.482 76.303,119.987 77.239,119.987 77.851,120.599 v1(77.851,122.149) ; U10.15@137.345,106.766 138.364,106.766 140.03,108.433 v1(140.03,111.123)
  Bottom Layer w0.2: v1(77.851,122.149) 85.217,122.149 89.916,117.45 108.407,117.45 113.919,111.938 140.845,111.938 ; v1(140.03,111.123) 140.845,111.938 ; U8.16@141.759,112.852 140.845,111.938
pads on no net: P18.A6 SW3.3 U1.60 U1.61 U1.62 U1.64 U2.5 U4.9 U4.10 U4.11 U4.12 U4.13 U5.2 U5.3 U5.4 U5.5 U5.6 U5.7 U5.14 U5.15 U5.16 U5.17 U5.19 U5.21 U5.22 U5.25 U6.1 U6.6 U6.11 U6.12 U8.4 U8.6 U8.7 U8.8 U8.9 U8.11 U8.12 U8.13 U8.14 U8.15 U8.17 U8.18 U8.19 U8.20 U10.2 U10.3 U10.4 U10.6 U10.7 U10.8 U10.9 U10.10 U10.16 U10.17 U10.18 U10.19 U10.20 U10.21 U10.22 U10.23 U10.24 U10.30 U10.31 U10.32 U10.33 U10.34 U10.35
copper on no net:
  other v2: 93.4,79.4 94.6,79.4 93.4,80.6 94.6,80.6

## Polygon pours and split planes (outlines as drawn)
GND on Top Layer "Bottom Layer-No Net" (solid, remove dead copper, pour order 3): 44,30 44,130 144,130 144,30
GND on Bottom Layer "Bottom Layer-No Net" (solid, remove dead copper, pour order 5): 44,30 44,130 144,130 144,30

## Keep-outs
Keep-Out Layer:
  the board outline again, w0.1

## Other copper
Top Layer:
  region net GND: 142,49.25 121,49.25 121,32.25 142,32.25
  region net 11V1-UF: 142.25,74.75 121.25,74.75 121.25,57.75 142.25,57.75
  pour cut-out: 119,76 119,55 144,55 144,76
Bottom Layer:
  pour cut-out: 119,76 119,55 144,55 144,76

## Silkscreen, mask and mechanical layers (free items; w line width, h text height)
Top Overlay:
  text "5v0" at 83,127.5 h1.25
  text "GND" at 85.5,127.5 h1.25
  text "GND" at 117.25,127 h1.25
  text "GND" at 101.5,125.75 h1.25
  text "3v3" at 102.25,118.25 h1.25
  text "3v3" at 112.5,116.75 h1.25
  text "5v0" at 93.25,116 h1.25
  text "GND" at 95.5,116 h1.25
  text "3v3" at 98.25,116 h1.25
  text "FU11" at 87.75,109.25 h1.25
  text "FU12" at 90.25,109.25 h1.25
  text "FU13" at 92.75,109.25 h1.25
  text "FU14" at 95.5,109.25 h1.25
  text "FU15" at 98.25,109.25 h1.25
  text "5v0" at 138.5,92.75 h1.25
  text "GND" at 140.75,92.75 h1.25
  text "SDA" at 93.25,89.25 h1.25
  text "SCL" at 96,89.25 h1.25
  text "3v3" at 98.75,89.25 h1.25
  text "GND" at 88,89 h1.25
  text "INT1" at 90.75,89 h1.25
  text "IMU PWM X" at 76,86 h1.25
  text "IMU PWM Y" at 76,83.25 h1.25
  text "IMU CONFIGMODE" at 106.77,83.25 h1.25
  text "IMU PWM Z" at 76,80.75 h1.25
  text "IMU ANALOG X" at 74.5,75.5 h1.25
  text "IMU ANALOG Y" at 74.5,73.25 h1.25
  text "IMU ANALOG Z" at 74.5,70.75 h1.25
  text "5v0" at 48.75,70.5 h1.25
  text "GND" at 51.25,70.5 h1.25
  text "5v0" at 59.75,70.5 h1.25
  text "GND" at 62,70.5 h1.25
  text "Battery +" at 122.25,70 h3
  text "ESC +" at 134.25,65.25 h3
  text "3V3" at 85.75,64.75 h1.25
  text "SDA" at 88,64.75 h1.25
  text "3V3" at 90.75,64.75 h1.25
  text "SCL" at 93.25,64.75 h1.25
  text "3V3" at 95.75,64.75 h1.25
  text "INT0" at 98.25,64.75 h1.25
  text "GNDA" at 100.75,64.75 h1.25
  text "5v0" at 68.5,57.25 h1.25
  text "GND" at 71,57.25 h1.25
  text "FU6" at 88.25,49.75 h1.25
  text "FU10" at 98.25,49.75 h1.25
  text "KeaDrone V2" at 108.25,45.75 h2
  text "Battery -" at 122,44.5 h3
  text "BaseBoard" at 108.25,44 h2
  text "FU1" at 88.25,43 h1.25
  text "FU5" at 98.25,43 h1.25
  text "Prototype only!" at 108.25,42.25 h2
  text "GND" at 88,41.25 h1.25
  text "ESC -" at 134,39.75 h3
  text "5v0" at 88,39 h1.25
  text "5v0" at 104,39 h1.25
  text "GND" at 106.25,39 h1.25
  text "11v1" at 88.25,34.5 h1.25
  text "GND" at 88.5,31.25 h1.25 r90

## Text inside footprints (layer, text, board x,y; h text height)
P12: Top Overlay "10" at 100.684,47.532 h1.27; Top Overlay "9" at 100.684,44.992 h1.27; Top Overlay "1" at 86.968,44.992 h1.27; Top Overlay "2" at 86.46,47.532 h1.27
P14: Top Overlay "10" at 100.434,113.782 h1.27; Top Overlay "9" at 100.434,111.242 h1.27; Top Overlay "1" at 86.718,111.242 h1.27; Top Overlay "2" at 86.21,113.782 h1.27
U5: Top Overlay "X" at 92.6,74.45 h1.25 r270; Top Overlay "Y" at 94.85,76.7 h1.25 r270; Top Overlay "Z" at 94.35,75.2 h1.25 r270
U6: Top Overlay "Y" at 100.5,72.1 h1.25 r180; Top Overlay "Z" at 99.5,70.1 h1.25 r180; Top Overlay "X" at 98.25,69.6 h1.25 r180
U10: Top Overlay "Antenna" at 125.545,123.266 h4